# EAGLE board mother_card_cs_1204pm (EAGLE 8.3.2)
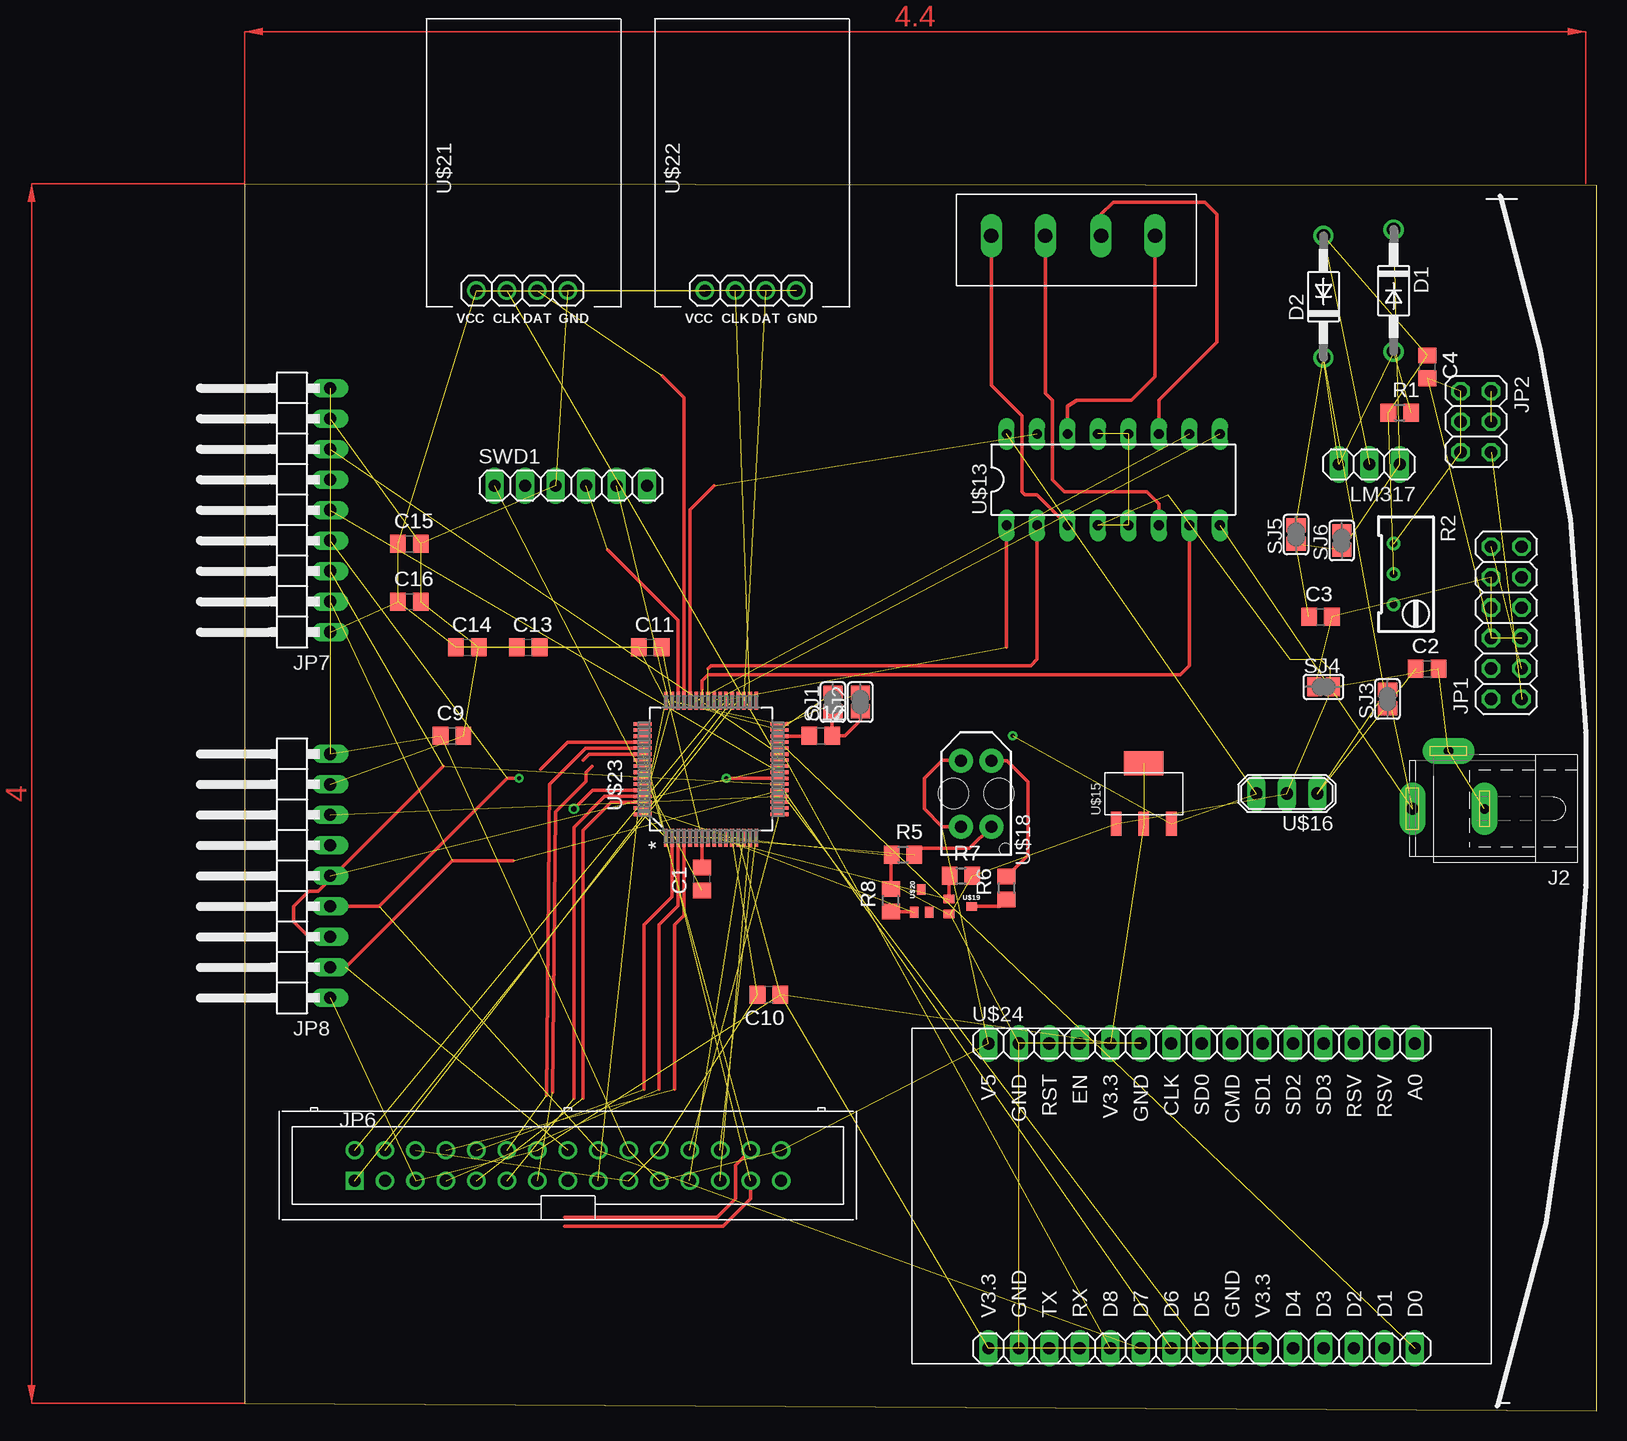
[diagram p0: board, top side]
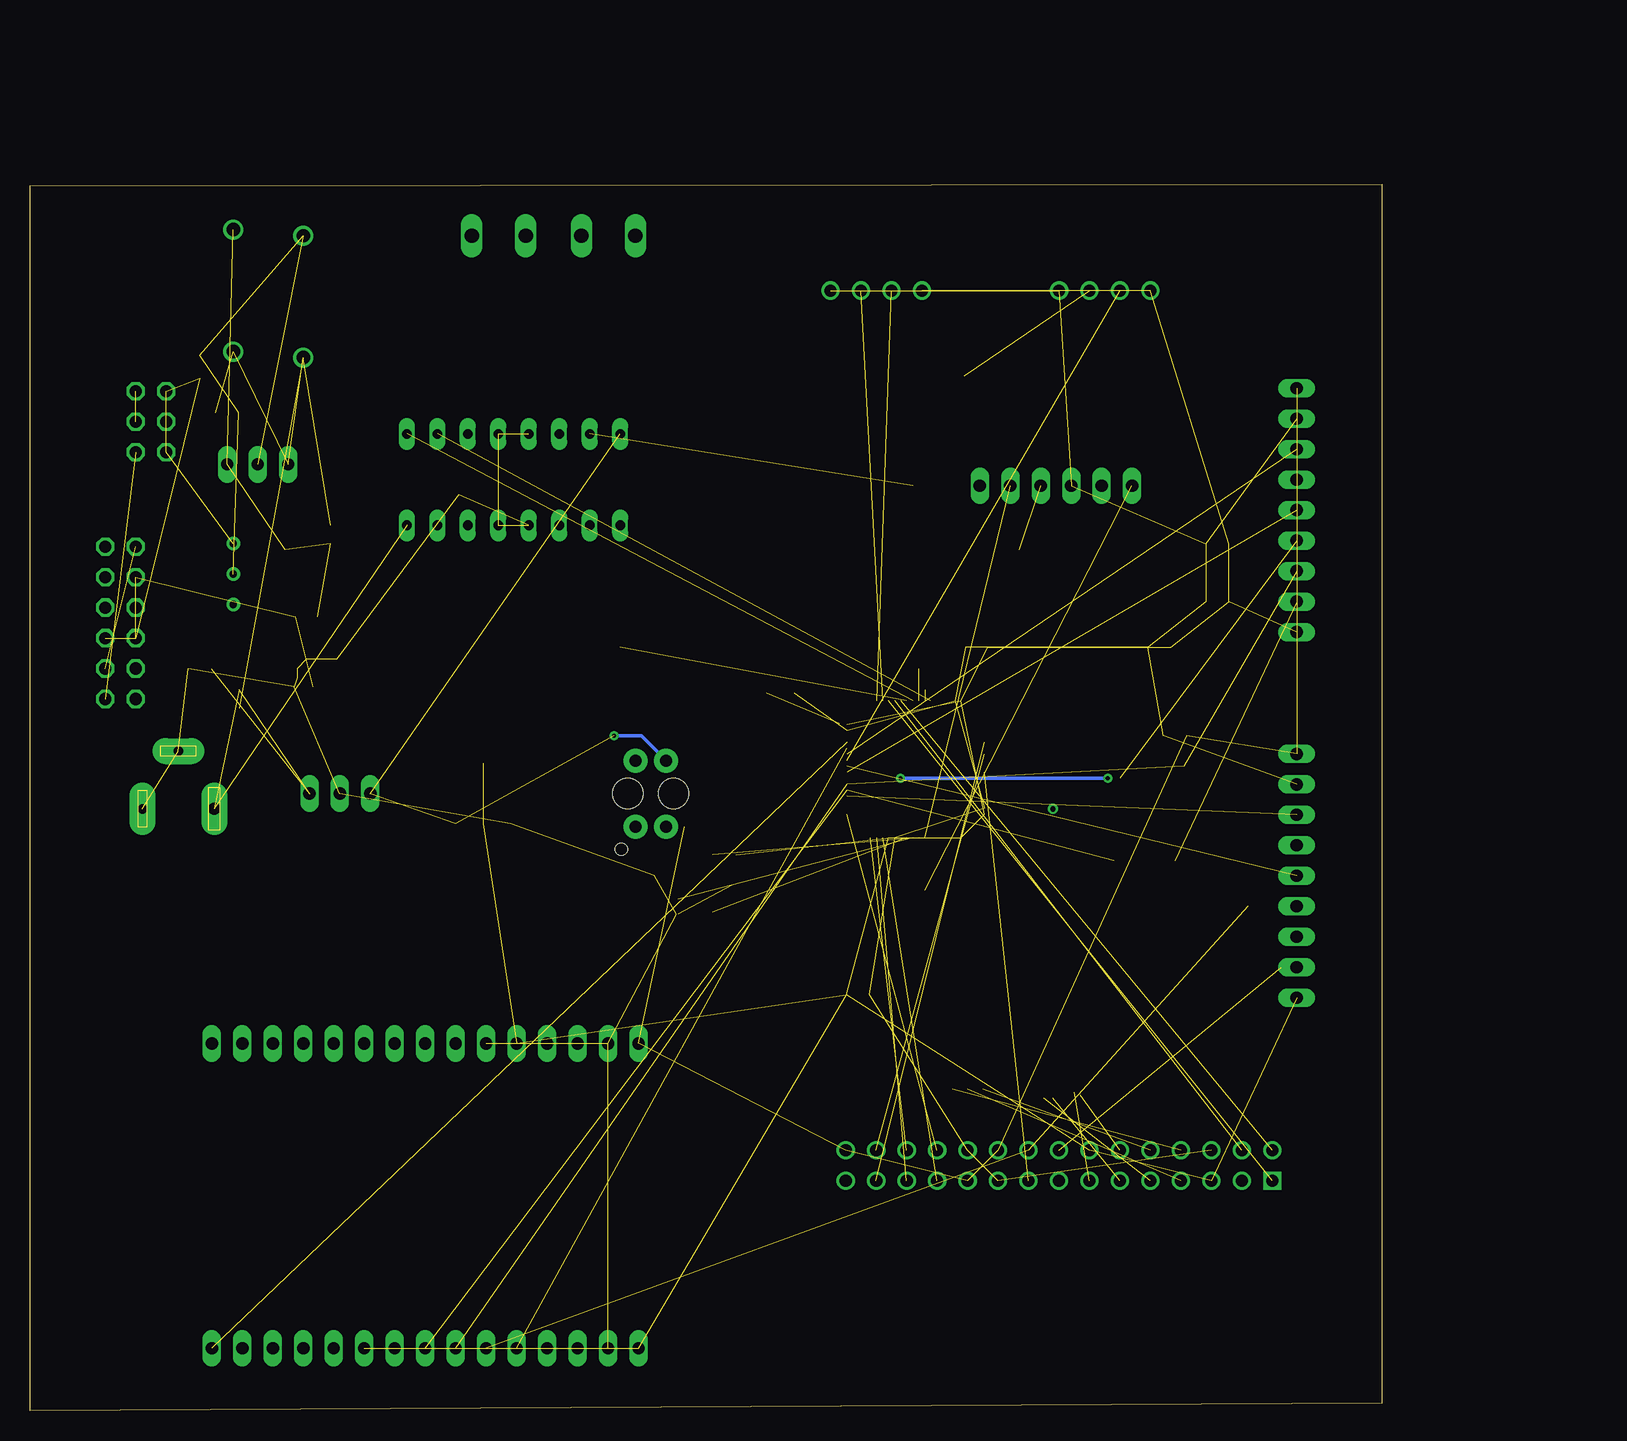
[diagram p1: board, bottom side, seen from below]

Size 112.7 x 102.23 mm. Coordinates in mm from the lower left corner, seen from the top.
Outline: 0,0.64 112.7,0 112.7,102.1 0,102.23 0,0.64
Copper layers (1*16): Top 0.035mm / dielectric 1.5mm / Bottom 0.035mm
Design rules "default": minimum track width 6mil, minimum drill 0.35mm, track to track 6mil, track to pad 6mil, pad to pad 6mil, via to via 6mil, smd to smd 6mil, copper to edge 40mil, drill to drill 6mil, minimum pad ring 10mil, minimum via ring 8mil, stop-mask expansion 4mil, vias tented up to drill 0mil, thermal gap 10mil

## Footprints (pad centres in the part's own frame; a part is rotated, then mirrored left to right if it is on the bottom)
C0805 = smd 1.3 x 1.5: 1 -0.95,0; 2 0.95,0
DO41-10 = drill 1.118: A 5.08,0; C -5.08,0
SPC4077 = drill 0.8 pad 2.184 long: 1 -3,0; 2 0,-4.8 | drill 1 pad 2.184 long: 3 3,0
2X06 = drill 1.016 octagon: 1 -6.35,-1.27; 2 -6.35,1.27; 3 -3.81,-1.27; 4 -3.81,1.27; 5 -1.27,-1.27; 6 -1.27,1.27; 7 1.27,-1.27; 8 1.27,1.27; 9 3.81,-1.27; 10 3.81,1.27; 11 6.35,-1.27; 12 6.35,1.27
2X03 = drill 1.016 octagon: 1 -2.54,-1.27; 2 -2.54,1.27; 3 0,-1.27; 4 0,1.27; 5 2.54,-1.27; 6 2.54,1.27
2X15/SOCK = drill 1.016 square: 1 -17.78,-1.27 | drill 1.016: 2 -17.78,1.27; 3 -15.24,-1.27; 4 -15.24,1.27; 5 -12.7,-1.27; 6 -12.7,1.27; 7 -10.16,-1.27; 8 -10.16,1.27; 9 -7.62,-1.27; 10 -7.62,1.27; 11 -5.08,-1.27; 12 -5.08,1.27; 13 -2.54,-1.27; 14 -2.54,1.27; 15 0,-1.27; 16 0,1.27; 17 2.54,-1.27; 18 2.54,1.27; 19 5.08,-1.27; 20 5.08,1.27; 21 7.62,-1.27; 22 7.62,1.27; 23 10.16,-1.27; 24 10.16,1.27; 25 12.7,-1.27; 26 12.7,1.27; 27 15.24,-1.27; 28 15.24,1.27; 29 17.78,-1.27; 30 17.78,1.27
1X09/90 = drill 1.016 long: 1 -10.16,-3.81; 2 -7.62,-3.81; 3 -5.08,-3.81; 4 -2.54,-3.81; 5 0,-3.81; 6 2.54,-3.81; 7 5.08,-3.81; 8 7.62,-3.81; 9 10.16,-3.81
1X03 = drill 1.016 long: 1 -2.54,0; 2 0,0; 3 2.54,0
R0805 = smd 1.3 x 1.5: 1 -0.95,0; 2 0.95,0
RTRIM64W = drill 0.61: 1 1.27,-2.54; 2 1.27,0; 3 1.27,2.54
SJ = smd 1.168 x 1.6: 1 -0.762,0; 2 0.762,0
1X06 = drill 1.016 long: 1 -6.35,0; 2 -3.81,0; 3 -1.27,0; 4 1.27,0; 5 3.81,0; 6 6.35,0
DIL16 = drill 0.813 long: 1 -8.89,-3.81; 2 -6.35,-3.81; 3 -3.81,-3.81; 4 -1.27,-3.81; 5 1.27,-3.81; 6 3.81,-3.81; 7 6.35,-3.81; 8 8.89,-3.81; 9 8.89,3.81; 10 6.35,3.81; 11 3.81,3.81; 12 1.27,3.81; 13 -1.27,3.81; 14 -3.81,3.81; 15 -6.35,3.81; 16 -8.89,3.81
1X4/BLOCK = drill 1.2 long: P$1 0,0; P$2 4.5,0; P$3 9.15,0; P$4 13.65,0
AP2114H = smd 0.9 x 2: GND -2.3,-2.52; VIN 2.3,-2.52; VOUT 0,-2.52 | smd 3.3 x 2: VOUTB 0,2.53
SIP3 = drill 1.016 long: GND 0,0; VI -2.54,0; VO 2.54,0
TCRT5000 = drill 1 pad 2: A 2.75,1.27; CATH 2.75,-1.27; COLL -2.75,1.27; E -2.75,-1.27 | hole 2.5: 0,1.9; 0,-1.9 | hole 1: -4.65,-2.45
SOT323 = smd 0.7 x 0.9: D 0,0.9; G -0.6,-1; S 0.65,-1
HX711 = drill 1.016: CLK -2.54,1.52; DAT -2.54,4.06; GND -2.54,6.6; VCC -2.54,-1.02
QFP50P1200X1200X160-64N = smd 1.5 x 0.3: 1 -5.715,3.759; 2 -5.715,3.251; 3 -5.715,2.743; 4 -5.715,2.261; 5 -5.715,1.753; 6 -5.715,1.245; 7 -5.715,0.762; 8 -5.715,0.254; 9 -5.715,-0.254; 10 -5.715,-0.762; 11 -5.715,-1.245; 12 -5.715,-1.753; 13 -5.715,-2.261; 14 -5.715,-2.743; 15 -5.715,-3.251; 16 -5.715,-3.759; 33 5.715,-3.759; 34 5.715,-3.251; 35 5.715,-2.743; 36 5.715,-2.261; 37 5.715,-1.753; 38 5.715,-1.245; 39 5.715,-0.762; 40 5.715,-0.254; 41 5.715,0.254; 42 5.715,0.762; 43 5.715,1.245; 44 5.715,1.753; 45 5.715,2.261; 46 5.715,2.743; 47 5.715,3.251; 48 5.715,3.759 | smd 0.3 x 1.5: 17 -3.759,-5.715; 18 -3.251,-5.715; 19 -2.743,-5.715; 20 -2.261,-5.715; 21 -1.753,-5.715; 22 -1.245,-5.715; 23 -0.762,-5.715; 24 -0.254,-5.715; 25 0.254,-5.715; 26 0.762,-5.715; 27 1.245,-5.715; 28 1.753,-5.715; 29 2.261,-5.715; 30 2.743,-5.715; 31 3.251,-5.715; 32 3.759,-5.715; 49 3.759,5.715; 50 3.251,5.715; 51 2.743,5.715; 52 2.261,5.715; 53 1.753,5.715; 54 1.245,5.715; 55 0.762,5.715; 56 0.254,5.715; 57 -0.254,5.715; 58 -0.762,5.715; 59 -1.245,5.715; 60 -1.753,5.715; 61 -2.261,5.715; 62 -2.743,5.715; 63 -3.251,5.715; 64 -3.759,5.715
ESP8266 = drill 1.016 long: A0 19.05,0; CLK -1.27,0; CMD 3.81,0; D0 19.05,-25.4; D1 16.51,-25.4; D2 13.97,-25.4; D3 11.43,-25.4; D4 8.89,-25.4; D5 1.27,-25.4; D6 -1.27,-25.4; D7 -3.81,-25.4; D8 -6.35,-25.4; EN -8.89,0; GND -13.97,-25.4; GND@1 3.81,-25.4; GND@2 -3.81,0; GND@3 -13.97,0; RST -11.43,0; RSV 16.51,0; RSV@1 13.97,0; RX -8.89,-25.4; SD0 1.27,0; SD1 6.35,0; SD2 8.89,0; SD3 11.43,0; TX -11.43,-25.4; V3.3 -16.51,-25.4; V3.3@1 6.35,-25.4; V3.3@2 -6.35,0; V5 -16.51,0

## Placement (x,y rotation side)
C1  [C0805]  38.1,44.32 90 top
C2  1u  [C0805]  98.55,61.85 0 top
C3  0.1u  [C0805]  89.66,66.17 0 top
C4  1u  [C0805]  98.55,87 270 top
C9  4.7u  [C0805]  17.27,56.26 0 top
C10  4.7u  [C0805]  43.69,34.67 180 top
C11  [C0805]  33.78,63.63 0 top
C12  [C0805]  48.01,56.26 0 top
C13  [C0805]  23.62,63.63 0 top
C14  [C0805]  18.54,63.63 0 top
C15  [C0805]  13.72,72.26 0 top
C16  [C0805]  13.72,67.44 0 top
D1  1N4004  [DO41-10]  95.76,93.34 270 top
D2  1N4004  [DO41-10]  89.92,92.84 90 top
J2  [SPC4077]  100.33,50.16 180 top
JP1  [2X06]  105.16,65.66 90 top
JP2  [2X03]  102.62,82.42 270 top
JP6  [2X15/SOCK]  26.92,20.45 0 top
JP7  [1X09/90]  3.3,75.06 90 top
JP8  [1X09/90]  3.3,44.58 90 top
LM317  [1X03]  93.73,78.87 180 top
R1  [R0805]  96.27,83.19 0 top
R2  [RTRIM64W]  97.03,69.72 180 top
R5  [R0805]  54.86,46.35 0 top
R6  [R0805]  63.5,43.56 90 top
R7  [R0805]  59.69,44.58 0 top
R8  [R0805]  53.85,42.54 90 top
SJ1  [SJ]  49.02,59.05 90 top
SJ2  [SJ]  51.31,59.05 90 top
SJ3  [SJ]  95.25,59.31 90 top
SJ4  [SJ]  89.92,60.32 0 top
SJ5  [SJ]  87.63,73.03 90 top
SJ6  [SJ]  91.44,72.52 90 top
SWD1  [1X06]  27.18,77.09 0 top
U$13  L293  [DIL16]  72.39,77.6 0 top
U$14  TERMINAL_BLOCK  [1X4/BLOCK]  62.23,97.92 0 top
U$15  AP2114H  [AP2114H]  74.93,51.43 0 top
U$16  OKI-78SR-W36  [SIP3]  86.87,51.43 180 top
U$18  TCRT5000  [TCRT5000]  60.96,51.43 90 top
U$19  DMG1012  [SOT323]  59.69,42.04 270 top
U$20  DMG1012  [SOT323]  56.39,42.54 0 top
U$21  HX711  [HX711]  20.32,90.81 270 top
U$22  HX711  [HX711]  39.37,90.81 270 top
U$23  STM32F410RBT6  [QFP50P1200X1200X160-64N]  38.86,53.47 90 top
U$24  ESP8266  [ESP8266]  78.49,30.61 0 top

## Library data of the parts
C1-C4 C9-C16 R1 R5-R8 U$13-U$16 U$18-U$24 = seniorDesign
D1 D2 = diode
J2 = con-jack; OC_FARNELL: unknown; OC_NEWARK: unknown
JP1 JP2 JP7 JP8 LM317 SWD1 = pinhead
JP6 = csomers
R2 = rcl
SJ1-SJ6 = jumper

## Nets
BOOT: U$23.60
F_A0: JP6.10 U$23.2
F_BUTTON: U$23.33
F_CLK: JP6.12 U$23.53
F_CS_DP: JP6.17 U$23.57
F_NCS1: JP6.9 U$23.62
F_NCS2: JP6.11 U$23.61
F_NRD: JP6.7 U$23.3
F_NRST: JP6.8 U$23.4
F_NWR: JP6.13
F_PWR_LED_B: JP6.27 U$23.52
F_PWR_LED_G: JP6.25 U$23.15
F_PWR_LED_R: JP6.23 U$23.14
F_RCLK: JP6.15
F_ROTA: JP6.2 U$23.38
F_ROTB: JP6.4 U$23.37
F_ROTSW: JP6.1 U$23.36
F_SEL: JP6.3
F_WIFI_LED_B: JP6.24 U$23.17
F_WIFI_LED_G: JP6.26 U$23.16
F_WIFI_LED_R: JP6.28 U$23.54
GND: C2.2 C9.2 C10.2 C11.2 C13.2 C14.2 C15.2 C16.2 J2.1 J2.2 JP6.6 JP6.19 JP6.22 JP7.8 JP8.8 R5.1 R7.2 R8.2 SJ1.2 SJ4.2 SWD1.3 U$13.4 U$13.5 U$13.12 U$13.13 U$15.GND U$16.GND U$19.S U$21.GND U$22.GND U$23.12 U$23.31 U$23.47 U$23.63 U$24.GND U$24.GND@1 U$24.GND@2 U$24.GND@3
INT: JP1.9
IR_DRAIN1: U$20.D
IR_SENS_ANLG_IN: R5.2 U$18.E U$23.8
IR_SOURCE1: U$20.S
IR_START0: R7.1 U$19.G U$23.9
IR_START1: R8.1 U$20.G U$23.10
MTR_A1: U$13.2 U$23.41
MTR_A2: U$13.7 U$23.42
MTR_B1: U$13.10 U$23.43
MTR_B2: U$13.15 U$23.44
MTR_EN1,2: U$13.1 U$23.39
MTR_EN3,4: U$13.9 U$23.40
MTR_OUT_A1: U$13.3 U$14.P$1
MTR_OUT_A2: U$13.6 U$14.P$2
MTR_OUT_B1: U$13.11 U$14.P$3
MTR_OUT_B2: U$13.14 U$14.P$4
N$1: C12.1 U$23.30
N$2: U$23.50
N$3: C12.2 SJ1.1 SJ2.1
N$4: C4.1 D2.A LM317.2 R1.1 R2.2
N$5: R6.2 U$18.CATH
N$6: U$23.56
N$7: U$23.51
N$10: R6.1 U$19.D
NFC_IRQ_NFC0: JP7.7 U$23.27
NFC_IRQ_NFC1: JP8.7 U$23.20
NFC_SEL_NFC0: JP7.5 U$23.24
NFC_SEL_NFC1: JP8.5 U$23.25
NRST: C1.2 SWD1.5 U$23.7
PRG_RX<: U$23.59
PRG_SWCLK: U$23.49
PRG_TX>: U$23.58
SCL: JP1.8
SDA: JP1.7
SPI2_CLK: U$22.CLK U$23.34
SPI2_MISO: U$22.DAT U$23.35
SPI5_CLK: U$21.CLK U$23.26
SPI5_MISO: U$21.DAT U$23.45
SPI_CLK: JP6.16 JP7.2 JP8.2 U$23.21 U$24.D5
SPI_MISO: JP7.3 JP8.3 U$23.22 U$24.D6
SPI_MOSI: JP6.18 JP7.4 JP8.4 U$23.23 U$24.D7
SWCLK: SWD1.2
SWDIO: SWD1.4 U$23.46
SWO: SWD1.6
USB12V: D1.A D2.C LM317.3 R1.2 SJ3.1 SJ5.2
USBGND: C3.2 C4.2 JP1.5 JP1.6 JP1.10 JP2.1 JP2.3 JP2.5 R2.1 SJ4.1
USBVBUS: C3.1 D1.C LM317.1 SJ5.1 SJ6.1
V3.3: C10.1 C11.1 C13.1 C14.1 C15.1 C16.1 JP6.5 JP6.14 JP7.1 JP8.1 SJ2.2 U$15.VOUT U$15.VOUTB U$21.VCC U$22.VCC U$23.1 U$23.13 U$23.32 U$23.48 U$23.64 U$24.V3.3 U$24.V3.3@1 U$24.V3.3@2
V5: C9.1 JP6.20 JP6.21 JP6.30 JP7.9 JP8.9 U$13.16 U$15.VIN U$16.VO U$18.A U$18.COLL U$24.V5
V12: C2.1 J2.3 SJ3.2 U$13.8 U$16.VI
V_PULLUP: JP1.2
VBUS: JP2.2 JP2.4
VBUS_A: JP1.4
VCONN: JP1.1 JP2.6
VDD: JP1.3 JP1.12
VDD_TARGET: C1.1 SWD1.1
VPU: JP1.11
WIFI_CS: U$23.28 U$24.D8
WIFI_GPIO: U$24.D1
WIFI_IRQ: U$23.29 U$24.D0

## Tracks (layer width: path | path; a pad name or v marks a point on that pad's centre or on a via)
BOOT  (via drill 0.45)
  Top 0.305: U$23.60 28.98,51.71 v27.43,50.16
F_A0  (1 unrouted)
  Top 0.305: U$23.2 35.61,42.85 33.27,40.51 33.27,26.8
F_CLK  (1 unrouted)
  Top 0.305: 25.15,26.29 25.4,52.2 28.42,55.22 U$23.53
F_CS_DP  (1 unrouted)
F_NCS1  (1 unrouted)
  Top 0.305: U$23.62 30.53,50.72 28.19,48.39 28.19,26.04
F_NCS2  (1 unrouted)
  Top 0.305: U$23.61 30,51.21 27.43,48.64 27.43,26.04
F_NRD  (1 unrouted)
  Top 0.305: U$23.3 36.12,42.09 34.54,40.51 34.54,26.8
F_NRST  (1 unrouted)
  Top 0.305: U$23.4 36.6,41.3 35.81,40.51 35.81,26.8
F_NWR  (1 unrouted)
  Top 0.305: 25.65,26.54 25.91,49.91 28.45,52.45 28.45,53.21 28.96,53.72
F_PWR_LED_B  (1 unrouted)
  Top 0.305: JP6.27 42.16,17.65 39.88,15.37 26.67,15.37 | U$23.52 26.9,55.73 24.64,53.47
F_PWR_LED_G  (1 unrouted)
F_PWR_LED_R  (1 unrouted)
F_ROTA  (1 unrouted)
F_ROTB  (1 unrouted)
F_ROTSW  (1 unrouted)
F_WIFI_LED_B  (1 unrouted)
F_WIFI_LED_G  (1 unrouted)
F_WIFI_LED_R  (1 unrouted)
  Top 0.305: U$23.54 28.68,54.71 28.19,54.23 | JP6.28 40.89,20.45 40.89,17.65 39.37,16.13 26.67,16.13
GND  (41 unrouted)
  Top 0.305: R8.2 53.85,46.29 R5.1 | U$19.S 58.82,41.39
  Top 0.406: R8.2 54.17,43.81
IR_SENS_ANLG_IN  (1 unrouted)
  Top 0.305: R5.2 56.32,46.67 56.13,46.86 60.41,46.86 U$18.E
IR_START0  (1 unrouted)
  Top 0.305: U$19.G 58.69,44.53 R7.1
IR_START1  (1 unrouted)
  Top 0.305: R8.1 55.74,41.59 U$20.G
  Top 0.406: 53.9,41.54 R8.1
MTR_A1  (1 unrouted)
  Top 0.305: U$13.2 66.04,62.61 65.53,62.1 38.86,62.1 38.61,61.85
MTR_A2  (1 unrouted)
  Top 0.305: U$13.7 78.74,62.1 77.98,61.34 38.61,61.34 38.1,60.83 38.1,60.07
MTR_B1  (1 unrouted)
MTR_B2  (1 unrouted)
  Top 0.305: U$23.44 37.11,75.08 39.12,77.09
MTR_EN1,2  (1 unrouted)
  Top 0.305: U$13.1 63.5,63.63
MTR_EN3,4  (1 unrouted)
MTR_OUT_A1
  Top 0.305: U$14.P$1 62.23,85.47 64.77,82.93 64.77,76.58 65.02,76.33 66.04,76.33 U$13.3
MTR_OUT_A2
  Top 0.305: U$13.6 76.2,75.57 75.18,76.58 68.33,76.58 67.31,77.6 67.31,84.2 66.73,84.78 U$14.P$2
MTR_OUT_B1
  Top 0.305: U$14.P$3 71.38,99.7 72.39,100.71 80.01,100.71 81.03,99.7 81.03,89.03 76.2,84.2 U$13.11
MTR_OUT_B2
  Top 0.305: U$14.P$4 75.88,86.17 73.91,84.2 69.34,84.2 68.58,83.69 U$13.14
N$1
  Top 0.305: U$23.30 47,56.21 C12.1
N$3
  Top 0.305: SJ1.1 48.96,58.23 C12.2 50.04,56.26 51.31,57.53 SJ2.1
N$4  (4 unrouted)
N$5
  Top 0.305: U$18.CATH 63.53,54.18 65.28,52.44 65.28,46.29 R6.2
N$10
  Top 0.305: U$19.D 62.93,42.04 R6.1
NFC_IRQ_NFC0  (1 unrouted)
NFC_IRQ_NFC1  (1 unrouted)
NFC_SEL_NFC0  (1 unrouted)
NFC_SEL_NFC1  (1 unrouted)
NRST  (1 unrouted)
  Top 0.305: U$23.7 C1.2
SPI2_CLK  (1 unrouted)
SPI2_MISO  (1 unrouted)
SPI5_CLK  (1 unrouted)
SPI5_MISO  (1 unrouted)
  Top 0.305: U$23.45 36.6,84.43 34.8,86.23
SPI_CLK  (4 unrouted)
  Top 0.305: JP8.2 8.38,36.96 17.27,45.85 22.35,45.85
SPI_MISO  (3 unrouted)
  Top 0.305: JP8.3 5.33,39.5 4.06,40.77 4.06,42.04 5.33,43.31 6.1,43.31 16.51,53.72
SPI_MOSI  (via drill 0.35)  (3 unrouted)
  Top 0.305: JP8.4 11.18,42.04 21.84,52.7 v22.86,52.7 | U$23.23 v40.13,52.7
  Bottom 0.305: v40.13,52.7 v22.86,52.7
SWDIO  (1 unrouted)
  Top 0.305: U$23.46 36.12,65.86 30.23,71.76
USB12V  (5 unrouted)
USBGND  (9 unrouted)
USBVBUS  (4 unrouted)
V3.3  (22 unrouted)
  Top 0.305: U$23.32 45.16,57.23 45.21,57.28
V5  (via drill 0.35)  (10 unrouted)
  Top 0.305: U$18.COLL 58.12,48.68 56.64,50.16 56.64,50.43 | 56.64,50.43 | 56.64,50.43 56.64,52.7 58.17,54.23 59.65,54.23 U$18.A
  Bottom 0.305: U$18.A 59.69,54.23 61.72,56.26 v64.01,56.26
V12  (4 unrouted)
VBUS  (1 unrouted)
VCONN  (1 unrouted)
VDD  (1 unrouted)
VDD_TARGET  (1 unrouted)
WIFI_CS  (1 unrouted)
WIFI_IRQ  (1 unrouted)
(copper drawn outside any net)
  shapes: Top area x2